# Altium PCB Control.PcbDoc
Units mm, origin at the board's own origin, x right, y up, seen from the top; angles counter-clockwise.
Board outline 35 x 50 mm, 2 copper layers (Top Layer, Bottom Layer); 25 components, 20 nets, 99 pads, 1 vias.
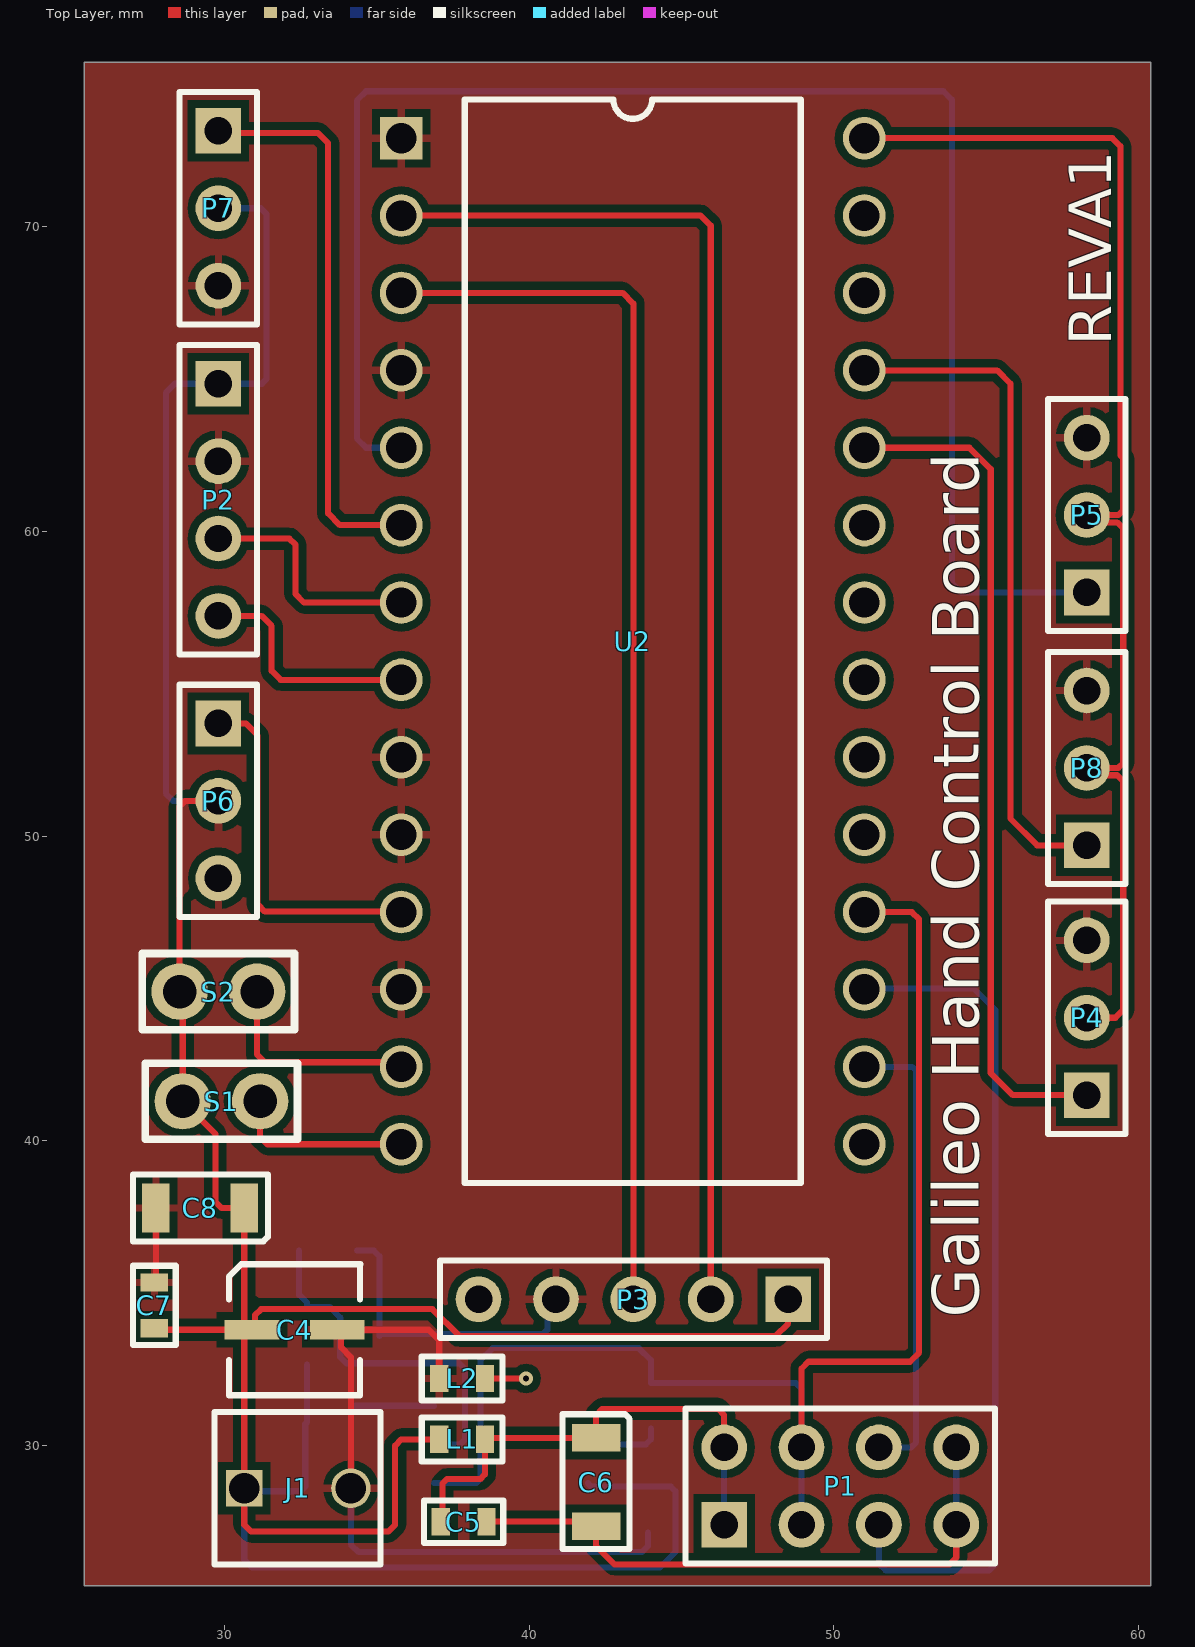
[diagram p0: Top Layer view]
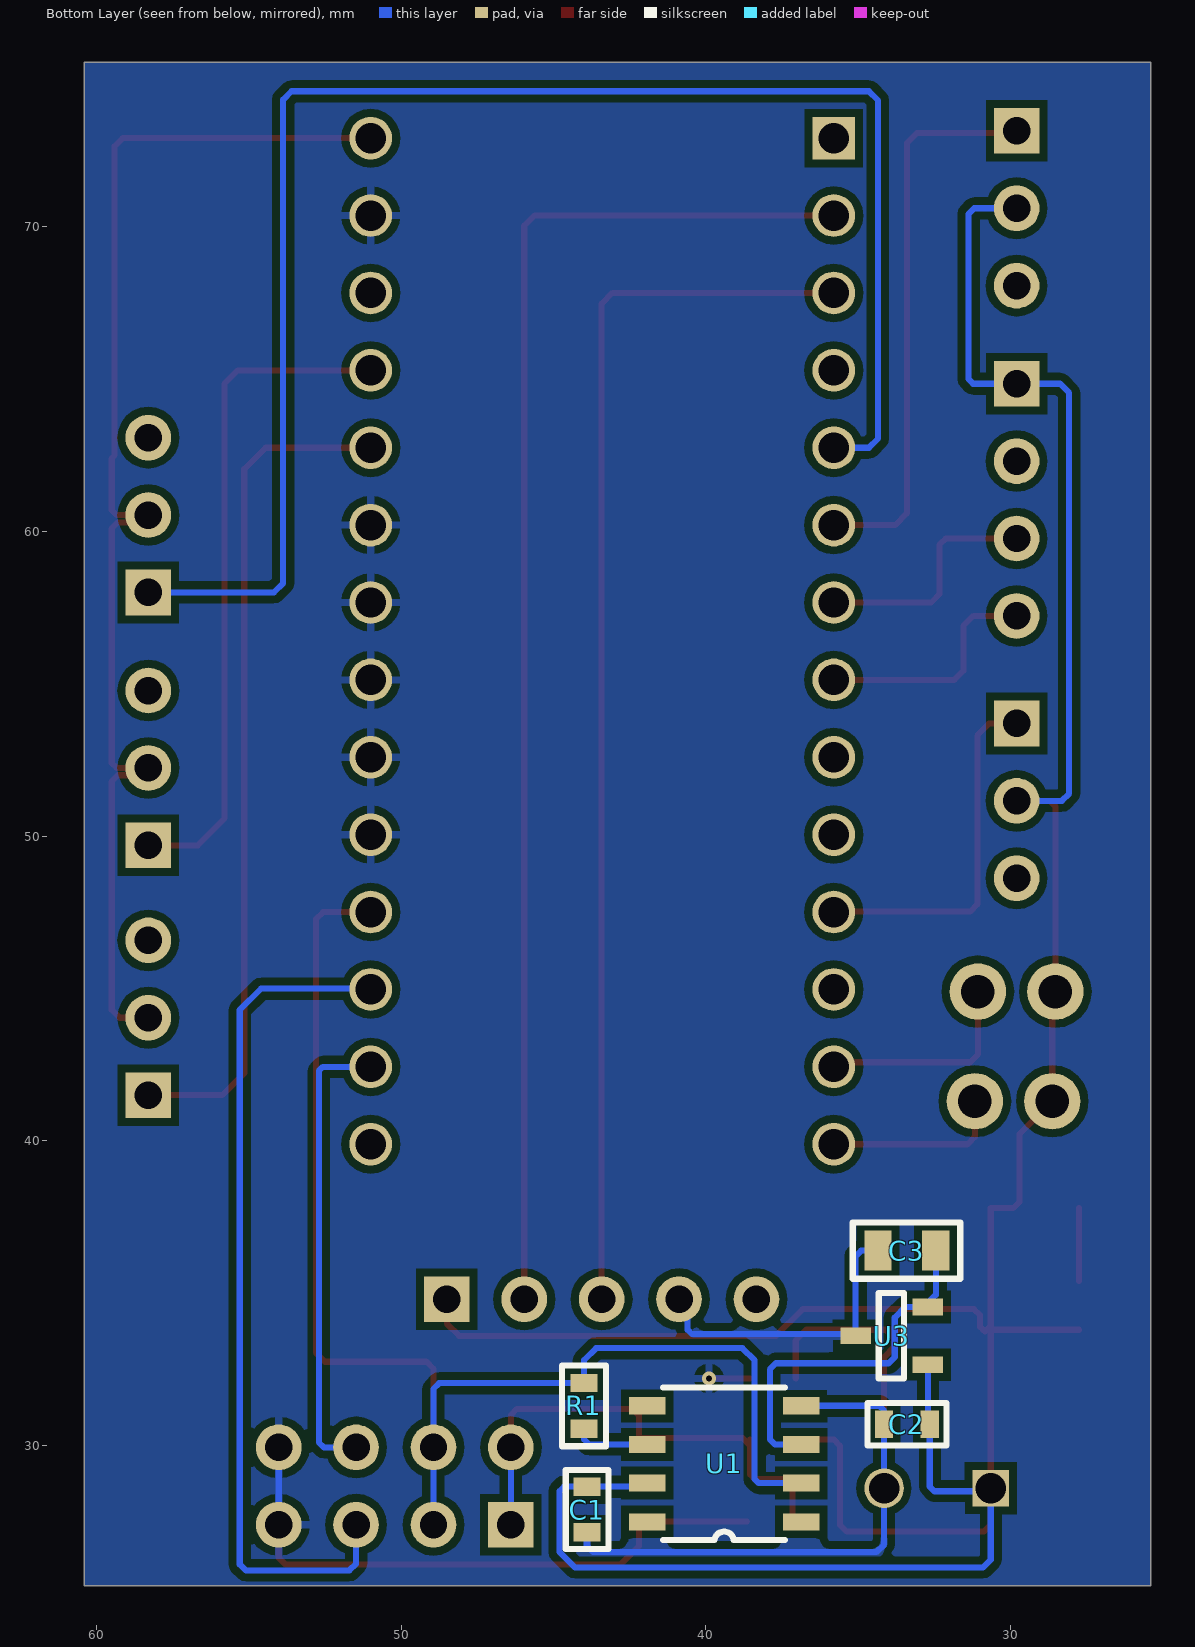
[diagram p1: Bottom Layer view, seen from below]

## Layer stack, top to bottom
Top Solder: solder mask 0.0102, Solder Resist, Dk 3.5
Top Layer: signal copper 0.0356
Dielectric 1: dielectric 0.32, FR-4, Dk 4.8
Bottom Layer: signal copper 0.0356
Bottom Solder: solder mask 0.0102, Solder Resist, Dk 3.5

## Board outline
25.4,25.4 60.4,25.4 60.4,75.4 25.4,75.4

## Design rules (kind name [scope] priority, off if disabled: settings)
Clearance [All] p1: gap=0.254
HoleToHoleClearance [All] p1: gap=0.1 allowstackedmicrovias=TRUE
MinimumSolderMaskSliver [All] p1: minsoldermaskwidth=0.1
PolygonConnect [All] p1: connectstyle=Relief reliefconductorwidth=0.254 reliefentries=4 polygonreliefangle="90 Angle" airgapwidth=0.254
RoutingVias [All] p1: holewidth=0.711 width=1.27 viastyle="Through Hole" minholewidth=0.711 minwidth=1.27 maxholewidth=0.711 maxwidth=1.27
SilkToSilkClearance [All] p1: silktosilkclearance=0.1
SilkToSolderMaskClearance [IsPad] p1: minsilkscreentomaskgap=0.1 clearancetoexposedcopper=TRUE
SolderMaskExpansion [All] p1: expansion=0.102
Width [All] p1: maxlimit=0.5 minlimit=0.15 preferedwidth=0.2
26 further rules are at their usual default settings.

## Classes and differential pairs
component class Control: C1 C2 C3 C4 C5 C7 J1 L1 L2 P1 P4 P5 P6 P7 P8 R1 U1 U3

## Components (designator, comment, footprint, x,y, rotation, side; value= is the part's Value field where it differs from the comment)
C1 "100nF" C0603 43.9,27.9 r90 bottom
C2 "1uF" C0603 33.4,30.7 r180 bottom
C3 "10nF" C0805 33.4,36.4 r180 bottom
C4 "10uF" CSVB 32.3,33.8 r0 top
C5 "100nF" C0603 37.85,27.5 r180 top
C6 "10uF, T" C1206 42.2,28.8 r270 top
C7 "100nF" C0603 27.7,34.6 r270 top
C8 "10uF, T" C1206 29.2,37.8 r180 top
J1 "TERMINAL BLOCK  2POS 3.5MM" 2POS3.5MM 32.4,28.6 r0 top
L1 "EMI FILTER BED" R0603 37.8,30.2 r0 top
L2 "EMI FILTER BED" R0603 37.8,32.2 r0 top
P1 "Header 4X2A" HDR2X4_CEN 46.4,27.4 r0 top
P2 "Header 4" HDR1X4 29.8,64.85 r270 top
P3 "Header 5" HDR1X5 48.5,34.8 r180 top
P4 "Header 3" HDR1X3 58.3,41.5 r90 top
P5 "Header 3" HDR1X3 58.3,58 r90 top
P6 "Header 3" HDR1X3 29.8,53.7 r270 top
P7 "Header 3" HDR1X3 29.8,73.15 r270 top
P8 "Header 3" HDR1X3 58.3,49.7 r90 top
R1 "100" R0603 44,31.3 r270 bottom
S1 "PB" SW 29.9,41.3 r180 top
S2 "PB" SW 29.8,44.9 r180 top
U1 "OPA335AIDR" SO-8 39.4,29.4 r0 bottom
U2 "Teensy 3.2 - NXP Cortex-M4F" DIP28 43.4,56.4 r0 top
U3 "REF3112AIDBZR" SOT-23 33.9,33.6 r180 bottom

## Footprints (in the part's own frame and the unit in brackets; to place one, negate y for a bottom-side part, rotate by r counter-clockwise, add the part's x,y. Pads: shape width x height; smd on the part's side, far side on the other; paste and mask are expansions set on the pad)
2POS3.5MM [mm]
  rect 1.2x1.2 hole 1: 1(-1.75,0)
  round 1.3 hole 1: 2(1.75,0)
  silkscreen extent -2.73,-2.5 2.73,2.5
C0603 [mm]
  rect 0.6x0.9 smd: 1(-0.75,0) 2(0.75,0)
  silkscreen extent -1.3,-0.7 1.3,0.7
C0805 [mm]
  rect 0.9x1.3 smd: 1(-0.95,0) 2(0.95,0)
  silkscreen extent -1.78,-0.92 1.75,0.92
C1206 [mm]
  rect 0.9x1.6 smd: 1(-1.45,0) 2(1.45,0)
  silkscreen extent -2.22,-1.1 2.2,1.1
CSVB [mm]
  rect 1.8x0.65 smd: 1(-1.4,0) 2(1.4,0)
  silkscreen extent -2.15,-2.15 2.16,2.15
DIP28 [mm]
  rect 1.4x1.4 hole 1: 1(-7.6,16.51)
  round 1.4 hole 1: 2(-7.6,13.97) 3(-7.6,11.43) 4(-7.6,8.89) 5(-7.6,6.35) 6(-7.6,3.81) 7(-7.6,1.27) 8(-7.6,-1.27) 9(-7.6,-3.81) 10(-7.6,-6.35) 11(-7.6,-8.89) 12(-7.6,-11.43) 13(-7.6,-13.97) 14(-7.6,-16.51) 15(7.6,-16.51) 16(7.6,-13.97) 17(7.6,-11.43) 18(7.6,-8.89) 19(7.6,-6.35) 20(7.6,-3.81) 21(7.6,-1.27) 22(7.6,1.27) 23(7.6,3.81) 24(7.6,6.35) 25(7.6,8.89) 26(7.6,11.43) 27(7.6,13.97) 28(7.6,16.51)
  silkscreen extent -5.52,-17.78 5.52,17.78
HDR1X3 [mm] "Connector; Header; 3 Position"
  rect 1.5x1.5 hole 0.9: 1(0,0)
  round 1.5 hole 0.9: 2(2.54,0) 3(5.08,0)
  silkscreen extent -1.27,-1.27 6.35,1.27
HDR1X4 [mm] "Connector; Header; 4 Position"
  rect 1.5x1.5 hole 0.9: 1(0,0)
  round 1.5 hole 0.9: 2(2.54,0) 3(5.08,0) 4(7.62,0)
  silkscreen extent -1.27,-1.27 8.89,1.27
HDR1X5 [mm] "Connector; Header; 5 Position"
  rect 1.5x1.5 hole 0.9: 1(0,0)
  round 1.5 hole 0.9: 2(2.54,0) 3(5.08,0) 4(7.62,0) 5(10.16,0)
  silkscreen extent -1.27,-1.27 11.43,1.27
HDR2X4_CEN [mm] "Connector; Header; 4x2 Position"
  rect 1.5x1.5 hole 0.9: 1(0,0)
  round 1.5 hole 0.9: 2(2.54,0) 3(5.08,0) 4(7.62,0) 5(0,2.54) 6(2.54,2.54) 7(5.08,2.54) 8(7.62,2.54)
  silkscreen extent -1.27,-1.27 8.89,3.81
R0603 [mm]
  rect 0.6x0.9 smd: 1(-0.75,0) 2(0.75,0)
  silkscreen extent -1.33,-0.72 1.33,0.72
SO-8 [mm]
  rect 1.194x0.559 smd: 1(-2.527,1.905) 2(-2.527,0.635) 3(-2.527,-0.635) 4(-2.527,-1.905) 5(2.527,-1.905) 6(2.527,-0.635) 7(2.527,0.635) 8(2.527,1.905)
  silkscreen extent -2,-2.5 2,2.5
SOT-23 [mm]
  rect 1x0.55 smd mask+0.07: 1(1.185,-0.95) 2(1.185,0.95) 3(-1.185,0)
  silkscreen extent -0.43,-1.4 0.4,1.4
SW [mm]
  round 1.85 hole 1.1: 1(-1.27,0) 2(1.27,0)
  silkscreen extent -2.5,-1.25 2.5,1.25

## Part data
C1 C5 C7: library part GRM188R71E104KA01D, "CAP CER 0.1UF 25V X7R 0603"
C2: library part GRM188R61E105KA12D, "CAP CER 1UF 25V X5R 0603"
C3: library part GRM216R71H103KA01D, "CAP CER 10000PF 50V X7R 0805"
C4: library part EEE-1EA100WR, "CAP ALUM 10UF 20% 25V SMD"
C6 C8: library part T491C106K020AT, "CAP TANT 10UF 20V 10% 2413"
J1: library part 0393570002, "CONN TERMINAL BLOCK 2POS 3.5MM"
L1 L2: library part BLM18PG471SN1D, "FERRITE BEAD 470 OHM 0603"
P1: "Header, 4-Pin, Dual row"
P2: "Header, 4-Pin"
P3: "Header, 5-Pin"
P4 P5 P6 P7 P8: "Header, 3-Pin"
R1: library part ERJ-3EKF1000V, "RES SMD 100 OHM 1% 1/10W 0603"
S1 S2: library part "D6C90 F1 LFS", "SWITCH PUSH SPST-NO 0.1A 32V"
U1: "IC OPAMP CHOPPER 2MHZ RRO 8SOIC"
U2: library part Teensy
U3: "IC VREF SERIES 1.25V SOT23-3"

## Via types
v1: diameter 0.45, hole 0.2, Top Layer to Bottom Layer, 1 vias

## Nets (pads, with @x,y where several pads share a name; then routed paths per layer and width w, separated by ;. In a path a pad name is that pad's centre, name@x,y a point inside that pad or via, vN(x,y) a via of type N, cw(c..) or ccw(c..) an arc to the next point about the centre after c; other vN are vias at no path point)
+5V/ANA: C5.2 C6.1 L1.2 P1.1 P1.5 | length 16.4
  Top Layer w0.2: C5.2@37.15,27.5 37.15,28.75 37.3,28.9 38.4,28.9 38.55,29.05 L1.2@38.55,30 ; L1.2 L1.2@38.55,30 ; P1.5 46.4,31 46.2,31.2 42.4,31.2 42.2,31 C6.1 38.8,30.25 L1.2@38.55,30
  Bottom Layer w0.2: P1.1 P1.5
+5V/DIG: C1.2 C2.2 C4.1 C7.2 C8.1 J1.1 L1.1 P2.1 P3.1 P4.2 P5.2 P6.2 P7.2 P8.2 S1.2 S2.2 U1.7 U2.28 U3.1 | length 153.9
  Top Layer w0.2: C7.2@27.75,33.8 C4.1@30.78,33.8 ; S2.2 28.53,50.98 28.71,51.16 P6.2@29.26,51.16 ; S2.2@28.63,44.8 S1.2 29.7,40.23 29.7,38 29.9,37.8 C8.1 30.65,33.93 C4.1@30.78,33.8 ; P6.2@29.4,51.3 P6.2@29.26,51.16 ; P6.2 P6.2@29.26,51.16 ; C4.1@30.65,33.73 J1.1 30.65,27.4 30.875,27.175 35.375,27.175 35.6,27.4 35.6,30 35.8,30.2 L1.1 ; C4.1@30.84,33.74 C4.1@30.78,33.8 ; C4.1 31,33.9 31,34.275 31.204,34.479 36.821,34.479 37.7,33.6 48.1,33.6 48.5,34 P3.1 ; U2.28 59.14,72.91 59.404,72.646 59.404,62.496 59.5,62.4 59.5,60.7 59.34,60.54 P5.2 58.54,60.3 59.3,60.3 59.5,60.1 59.5,52.4 59.34,52.24 P8.2 58.54,52 59.3,52 59.5,51.8 59.5,44.3 59.24,44.04 P4.2
  Bottom Layer w0.2: P6.2 28.315,51.16 28.075,51.4 28.075,64.55 28.375,64.85 P2.1 31.225,64.85 31.375,65 31.375,70.425 31.19,70.61 P7.2 ; U3.1 32.715,30.765 C2.2 32.65,28.65 32.5,28.5 30.75,28.5 J1.1 30.65,26.25 30.9,26 44.3,26 44.8,26.5 44.8,28.5 44.65,28.65 C1.2 42.042,28.65 U1.7
AGND: C5.1 C6.2 L2.2 P1.4 P1.8 U2.19 U2.20 U2.21 U2.22 U2.23 U2.27 | length 21.4
  Top Layer w0.2: L2.2 v1(39.9,32.2) ; C5.1@38.65,27.5 42.05,27.5 C6.2 42.2,26.7 42.8,26.1 53.8,26.1 54.02,26.32 P1.4
  Bottom Layer w0.2: P1.4 P1.8
E1: P1.3 U2.17 | length 28.1
  Bottom Layer w0.2: U2.17 51.03,45 54.6,45 55.3,44.3 55.3,26.1 55.1,25.9 51.7,25.9 51.48,26.12 P1.3
E2: P1.7 U2.16 | length 15.5
  Top Layer w0.2: P1.7 P1.7@51.74,29.94
  Bottom Layer w0.2: U2.16 52.57,42.43 52.7,42.3 52.7,30.1 52.54,29.94 P1.7
GND: C1.1 C2.1 C3.1 C4.2 C7.1 C8.2 J1.2 L2.1 P2.2 P3.4 P4.3 P5.3 P6.3 P7.3 P8.3 U1.4 U2.1 U2.4 U2.9 U2.10 U2.12 U3.3 | length 40.5
  Top Layer w0.2: C7.1@27.75,35.4 C8.2 ; C4.2 C4.2@34.1,33.8 ; J1.2 34.15,32.898 33.827,33.221 33.827,33.527 C4.2@34.1,33.8 ; L2.1 37.05,33.45 36.7,33.8 C4.2@34.1,33.8
  Bottom Layer w0.2: C3.1 34.9,36.4 35.085,36.215 U3.3 35.139,33.654 40.454,33.654 40.6,33.8 40.6,34.52 P3.4 P3.4@41,34.68 ; U1.4 34.305,31.305 34.15,31.15 J1.2 34.15,26.75 34.4,26.5 43.7,26.5 43.9,26.7 C1.1
NetC3_2: C3.2 U1.3 U3.2 | length 12.2
  Bottom Layer w0.2: C3.2 32.45,34.95 32.715,34.685 U3.2 33.45,34.55 33.8,34.2 33.8,32.9 34,32.7 37.7,32.7 37.9,32.5 37.9,30.2 37.735,30.035 U1.3
NetR1_2: R1.2 U1.6 | length 2.5
  Bottom Layer w0.2: U1.6 43.835,30.035 44,30.2 R1.2
REF: P1.2 P1.6 R1.1 U1.2 U2.18 | length 44.4
  Top Layer w0.2: P1.6 48.94,32.525 49.165,32.75 52.5,32.75 52.8,33.05 52.8,47.275 52.565,47.51 U2.18
  Bottom Layer w0.2: U1.2 38.265,28.765 38.4,28.9 38.4,32.8 38.8,33.2 43.6,33.2 44,32.8 R1.1 48.75,32.05 48.94,31.86 P1.6 P1.2
RX_LCD: P3.2 U2.2 | length 45.5
  Top Layer w0.2: U2.2 45.63,70.37 45.96,70.04 P3.2
RX_VR: P2.3 U2.7 | length 7.8
  Top Layer w0.2: P2.3 32.13,59.77 32.325,59.575 32.325,57.95 32.605,57.67 U2.7
S1: P4.1 U2.24 | length 27.7
  Top Layer w0.2: U2.24 54.45,62.75 55.15,62.05 55.15,42.225 55.875,41.5 P4.1
S2: P5.1 U2.5 | length 52.9
  Bottom Layer w0.2: U2.5 34.65,62.75 34.35,63.05 34.35,74.15 34.65,74.45 53.6,74.45 53.875,74.175 53.875,58.3 54.175,58 P5.1
S3: P6.1 U2.11 | length 11.8
  Top Layer w0.2: P6.1 30.7,53.7 31.09,53.31 31.09,47.76 31.325,47.525 35.785,47.525 U2.11
S4: P7.1 U2.6 | length 19.1
  Top Layer w0.2: P7.1@29.725,73.075 33.075,73.075 33.4,72.75 33.4,60.6 33.79,60.21 U2.6 U2.6@35.41,60.6
S5: P8.1 U2.25 | length 22.1
  Top Layer w0.2: U2.25 55.36,65.29 55.8,64.85 55.8,50.575 56.675,49.7 P8.1
SW1: S2.1 U2.13 | length 7.1
  Top Layer w0.2: S2.1 31.07,42.83 31.321,42.579 35.8,42.579 U2.13 U2.13@35.77,42.4
SW2: S1.1 U2.14 | length 5.9
  Top Layer w0.2: S1.1 31.17,40.13 31.41,39.89 U2.14
TX_LCD: P3.3 U2.3 | length 40.4
  Top Layer w0.2: U2.3 43.07,67.83 43.42,67.48 P3.3
TX_VR: P2.4 U2.8 | length 7.7
  Top Layer w0.2: P2.4 31.22,57.23 31.55,56.9 31.55,55.425 31.845,55.13 U2.8
pads on no net: P3.5 U1.1 U1.5 U1.8 U2.15 U2.26

## Polygon pours and split planes (outlines as drawn)
GND on Bottom Layer "GND" (solid, pour order 8): 34.05,26.975 44.35,26.975 44.35,26.05 44.3,26 34.05,26 34.05,26.95 34.075,26.975
GND on Bottom Layer "GND" (solid, pour order 6): 34.525,33.95 40.425,33.95 40.425,32.85 34.525,32.85 34.525,33.95
AGND on Bottom Layer "AGND" (solid, pour order 2): 25.4,25.4 60.4,25.4 60.4,75.4 25.4,75.4 25.4,25.4
+5V/DIG on Top Layer "+5V/DIG" (solid, pour order 12): 28.2,52.275 30.75,52.275 30.75,47.875 30.7,47.925 28.2,47.925 28.2,52.225 28.175,52.25
GND on Top Layer "GND" (solid, pour order 10): 25.4,75.4 60.4,75.4 60.4,25.4 25.4,25.4 25.4,75.4

## Silkscreen, mask and mechanical layers (free items; w line width, h text height)
Top Overlay:
  text "REVA1" at 59.1,66.1 h1.4 r90
  text "Galileo Hand Control Board" at 54.75,34.2 h1.52 r90
Board Outline:
  lines w0.254: 25.4,25.4 25.4,75.4 60.4,75.4 ; 25.4,25.4 25.4,25.4 ; 25.4,25.4 60.4,25.4 60.4,75.4 ; 60.4,75.4 60.4,75.4